# Altium PCB Item.PcbDoc
Units mm, origin at the board's own origin, x right, y up, seen from the top; angles counter-clockwise.
Board outline 41 x 41 mm, 2 copper layers (Top Layer, Bottom Layer); 32 components, 42 nets, 161 pads, 99 vias.
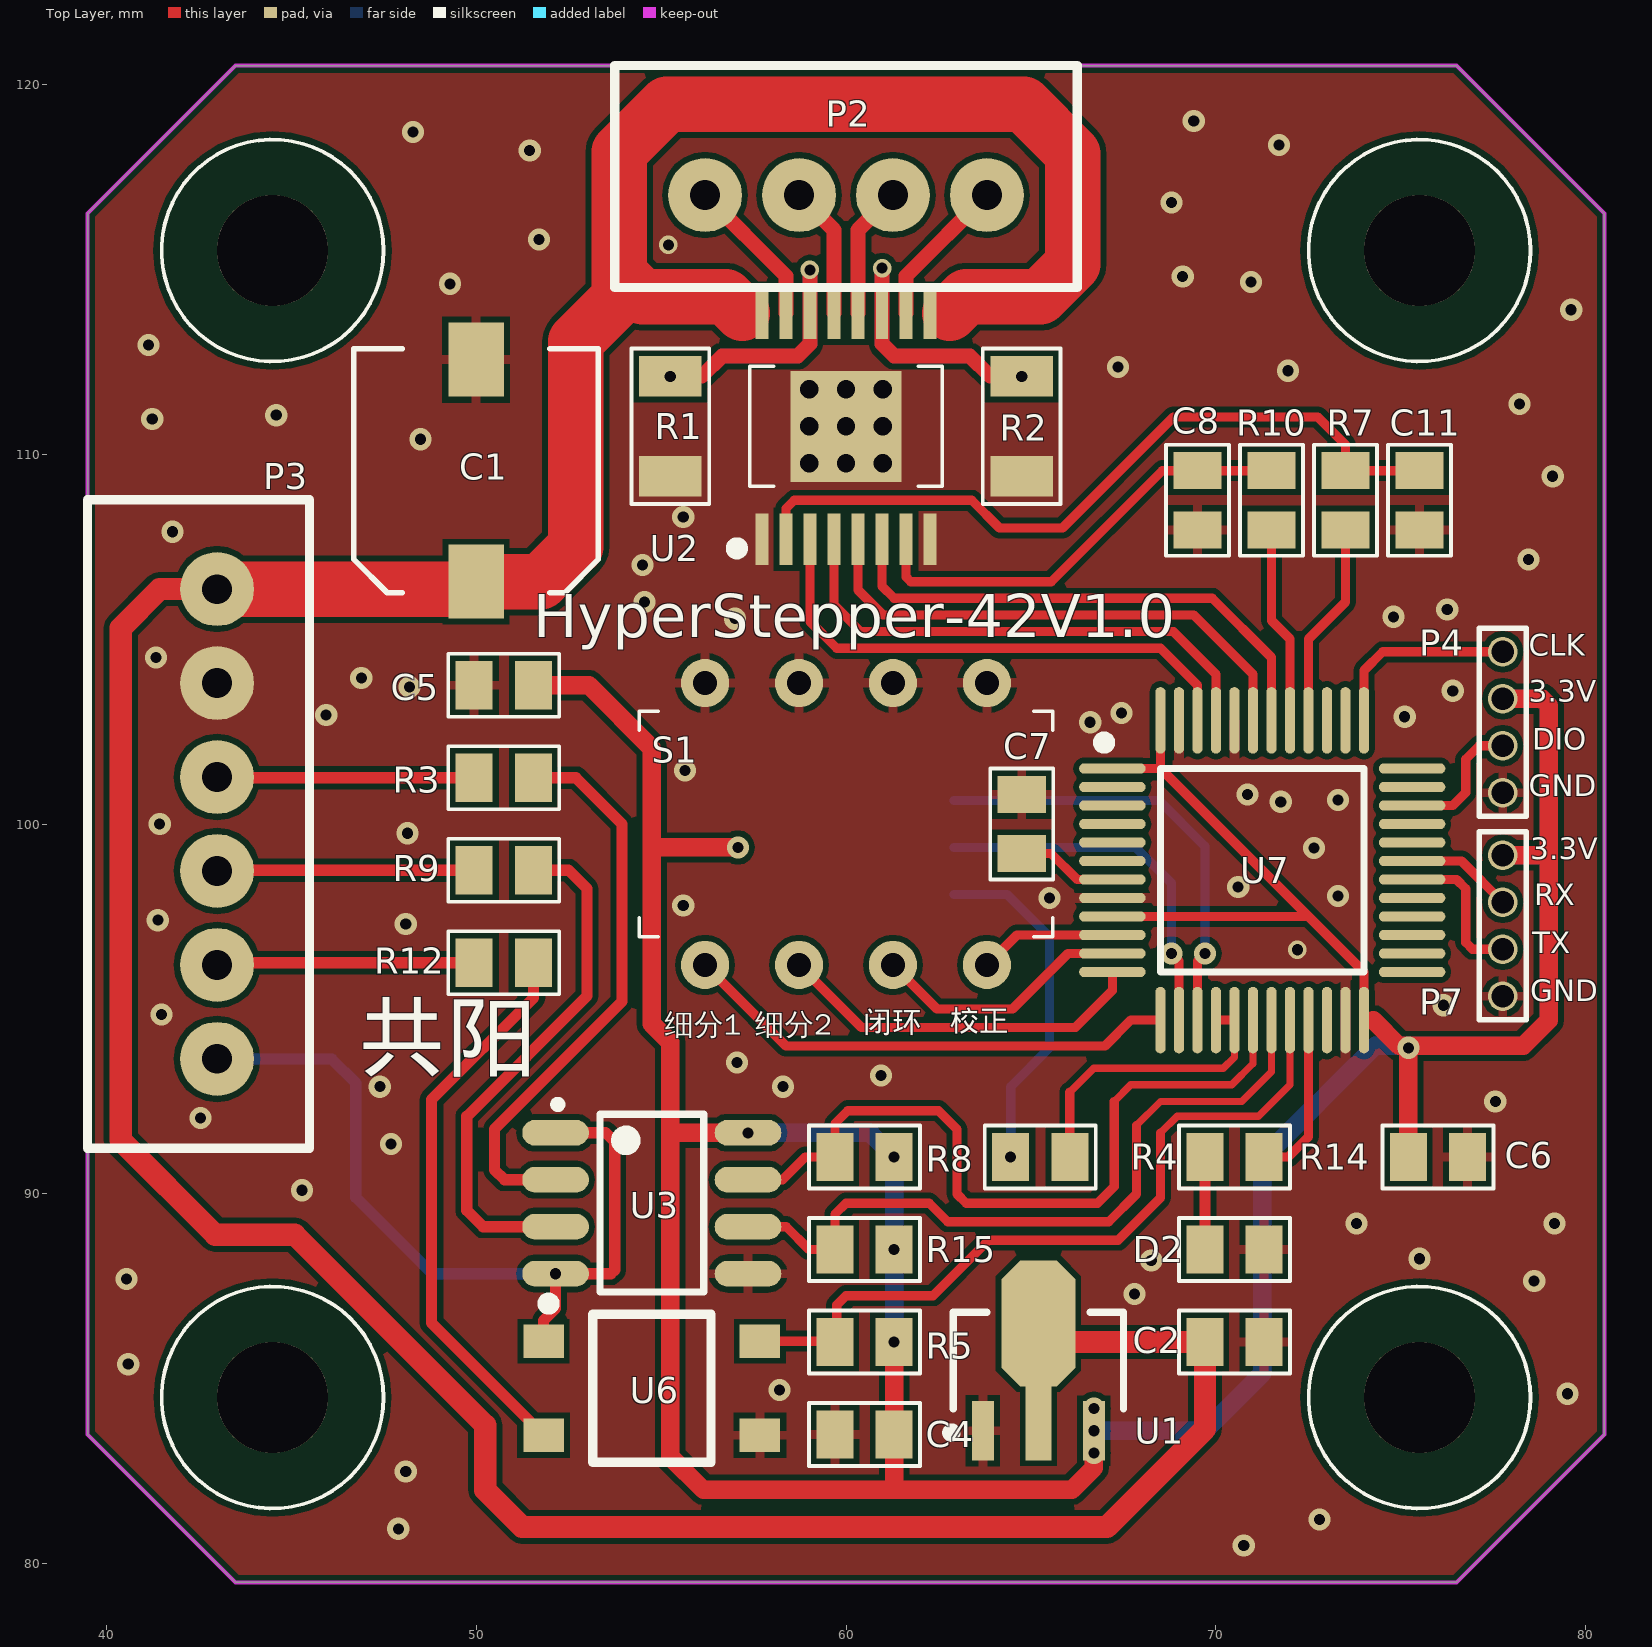
[diagram p0: Top Layer view]
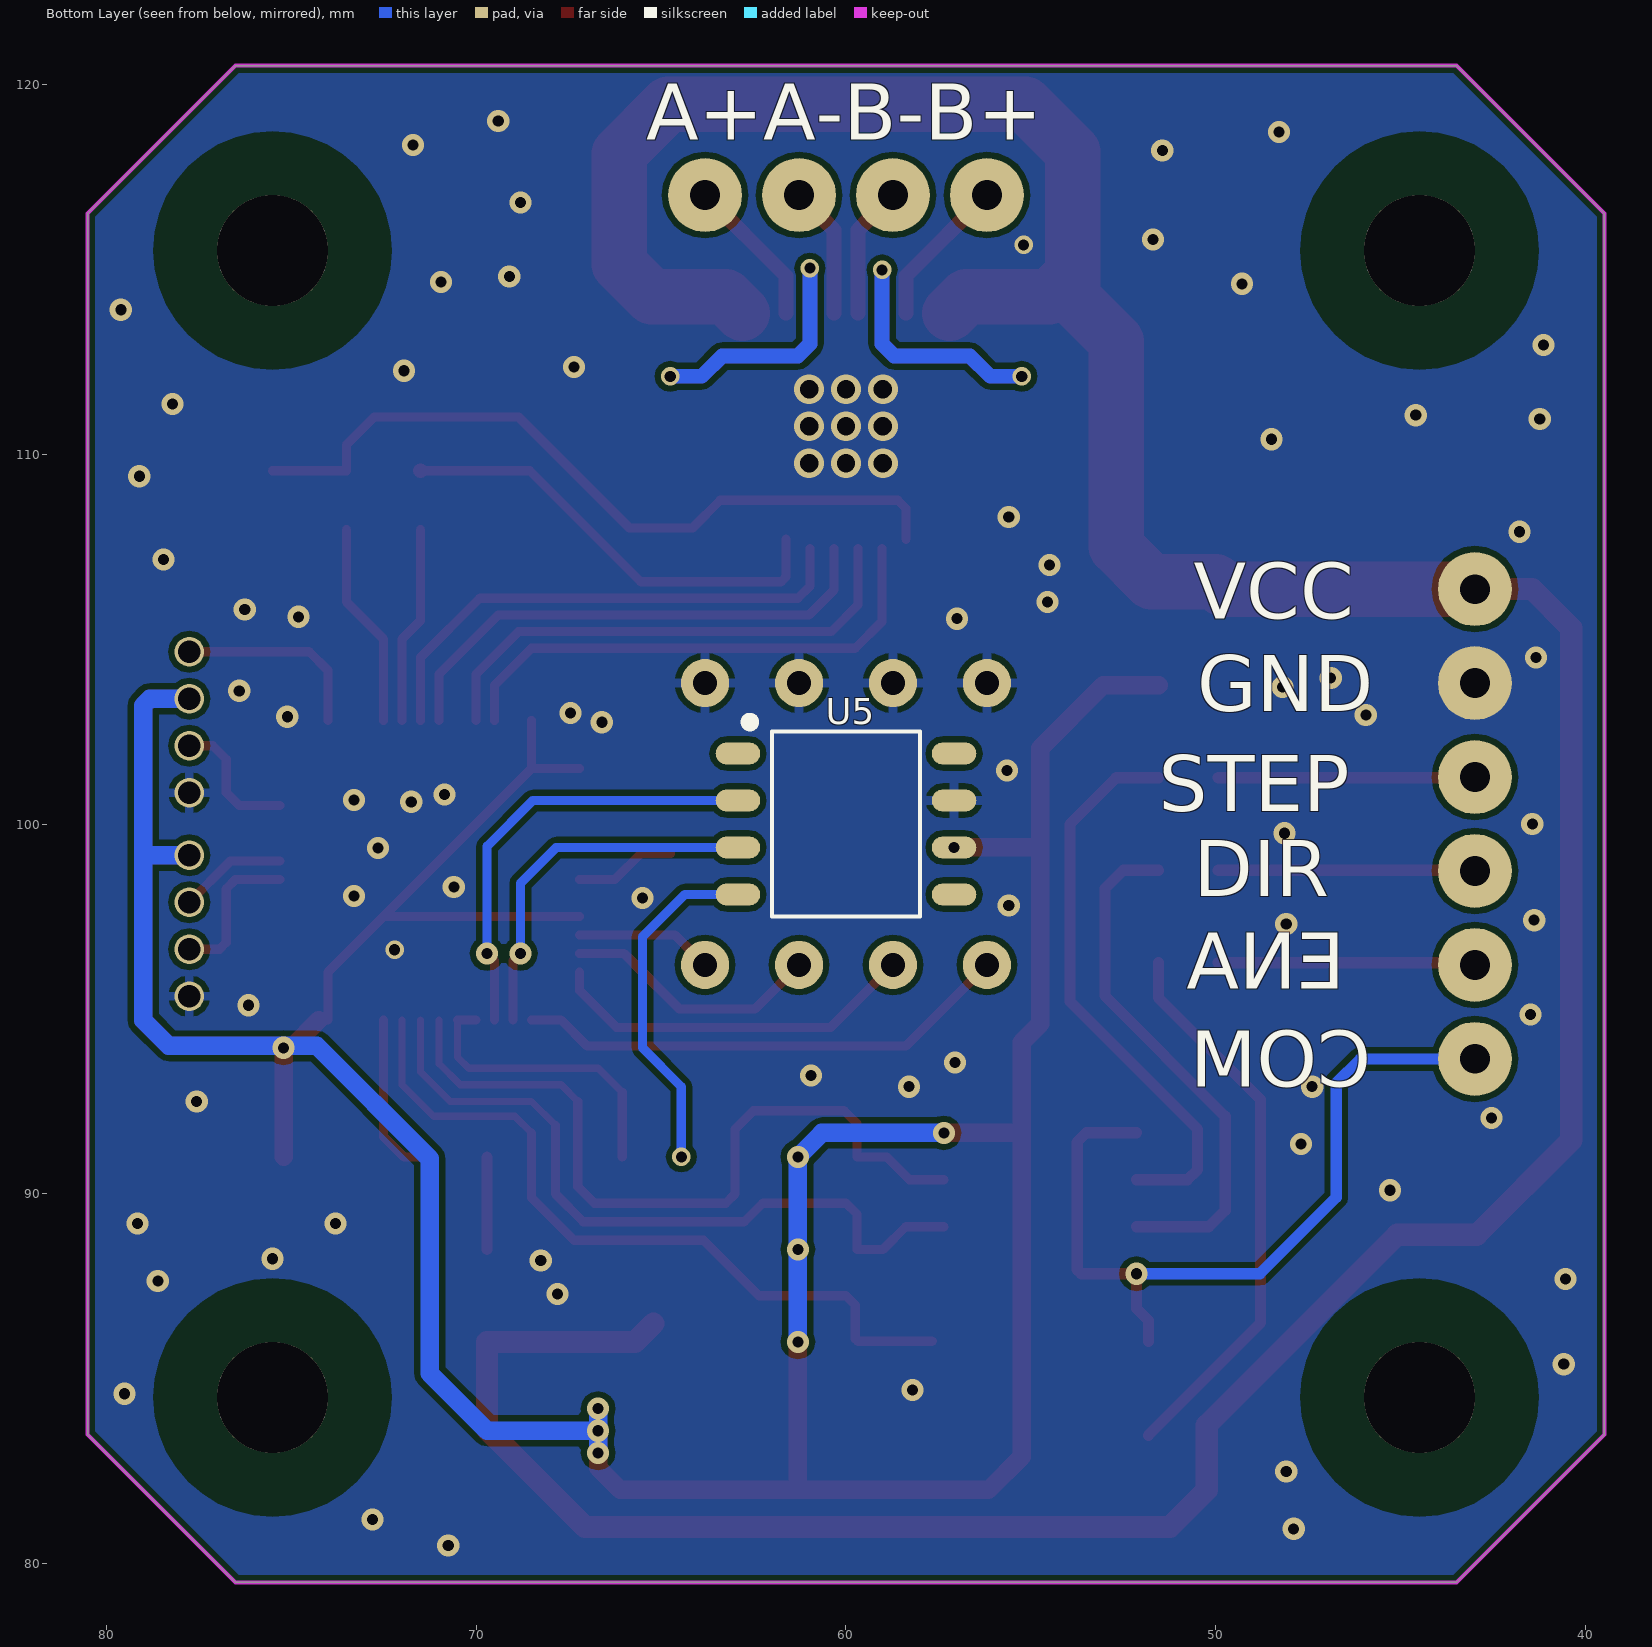
[diagram p1: Bottom Layer view, seen from below]

## Layer stack, top to bottom
Top Layer: signal copper 0.0356
Dielectric: dielectric 0.32, FR-4, Dk 4.8
Bottom Layer: signal copper 0.0356

## Board outline
39.5,116.5 43.5,120.5 76.5,120.5 80.5,116.5 80.5,83.5 76.5,79.5 43.5,79.5 39.5,83.5

## Design rules (kind name [scope] priority, off if disabled: settings)
Clearance [All] p1: gap=0.16
ComponentClearance [All] p1: gap=0 collisioncheckmode=3 verticalgap=0 showdistances=FALSE
HoleSize [All] p1: absolutevalues=TRUE maxlimit=5 minlimit=0.3 maxpercent=80.000 minpercent=20.000
HoleToHoleClearance [All] p1: gap=0.16 allowstackedmicrovias=TRUE
MinimumSolderMaskSliver [All] p1: minsoldermaskwidth=0
PolygonConnect PolygonConnect_2 [(InComponent('U2') OR InComponent('R1') OR InComponent('R2') OR InComponent('P3'))] p1: connectstyle=Direct reliefconductorwidth=0.254 reliefentries=4 polygonreliefangle="90 Angle"
PolygonConnect PolygonConnect_1 [isvia] p2: connectstyle=Direct reliefconductorwidth=0.254 reliefentries=4 polygonreliefangle="90 Angle"
PolygonConnect [All] p3: connectstyle=Relief reliefconductorwidth=0.254 reliefentries=4 polygonreliefangle="90 Angle"
RoutingVias [All] p1: holewidth=0.3 width=0.6 viastyle="Through Hole" minholewidth=0.3 minwidth=0.5 maxholewidth=0.711 maxwidth=1.27
SilkToSilkClearance [All] p1: silktosilkclearance=0
SilkscreenOverComponentPads [All] p1: minsilkscreentomaskgap=0.1
SolderMaskExpansion [All] p1: expansion=0.102
Width [All] p1: maxlimit=5 minlimit=0.16 preferedwidth=0.25
22 further rules are at their usual default settings.

## Components (designator, comment, footprint, x,y, rotation, side; value= is the part's Value field where it differs from the comment)
C1 "CAP POL" CAP6377 50,109.55 r180 top
C2 "CAP" 0805 70.5,86 r0 top
C4 "CAP" 0805 60.5,83.5 r180 top
C5 "CAP" 0805 50.75,103.75 r180 top
C6 "CAP" 0805 76,91 r0 top
C7 "CAP" 0805 64.75,100 r270 top
C8 "CAP" 0805 69.5,108.75 r270 top
C11 "CAP" 0805 75.5,108.75 r270 top
D2 "LED" 0805 70.5,88.5 r0 top
P2 "HEADER4" XH-4 60,117 r180 top
P3 "HEADER6" XH-6 43,100 r270 top
P4 "HEADER4" 4P-1.27MM 77.75,102.75 r270 top
P7 "HEADER4" 4P-1.27MM 77.75,97.25 r270 top
R1 "RES" 1206 55.25,110.75 r90 top
R2 "RES" 1206 64.75,110.75 r90 top
R3 "RES" 0805 50.75,101.25 r0 top
R4 "RES" 0805 65.25,91 r0 top
R5 "RES" 0805 60.5,86 r0 top
R7 "RES" 0805 73.5,108.75 r270 top
R8 "RES" 0805 60.5,91 r0 top
R9 "RES" 0805 50.75,98.75 r0 top
R10 "RES" 0805 71.5,108.75 r90 top
R12 "RES" 0805 50.75,96.25 r0 top
R14 "RES" 0805 70.5,91 r180 top
R15 "RES" 0805 60.5,88.5 r180 top
S1 "SWDIP-4" SWDIP-4 60,100 r90 top
U1 "HT7333" SOT89 65.2,85.5 r0 top
U2 "A4954" TSSOP16-A4954 60,110.75 r0 top
U3 "TLP2168" SO-8_3.9MM 54.75,89.75 r270 top
U5 "TLE5012B" PG-DSO-8F 60,100 r180 bottom
U6 "EL817" SOP-4_P2.54 54.75,84.75 r0 top
U7 "STM32F030C8" LQFP-48_7x7x05P 71.25,98.75 r270 top

## Footprints (in the part's own frame and the unit in brackets; to place one, negate y for a bottom-side part, rotate by r counter-clockwise, add the part's x,y. Pads: shape width x height; smd on the part's side, far side on the other; paste and mask are expansions set on the pad)
4P-1.27MM [mm]
  round 0.8 hole 0.6: 1(-1.905,0) 2(-0.635,0) 3(0.635,0) 4(1.905,0)
  silkscreen extent -2.54,-0.64 2.54,0.64
0805 [mm] "Chip Resistor, Body 2.0x1.2mm, IPC High Density"
  rect 1x1.3 smd: 1(-0.8,0) 2(0.8,0)
  silkscreen extent -1.5,-0.85 1.5,0.85
1206 [mm] "Chip Capacitor, Body 3.2x1.6mm, IPC High Density"
  rect 1.1x1.7 smd: 1(-1.35,0) 2(1.35,0)
  silkscreen extent -2.1,-1.05 2.1,1.05
CAP6377 [mm]
  rect 1.5x2 smd: 1(0,3) 2(0,-3)
  silkscreen extent -3.3,-3.3 3.3,3.3
LQFP-48_7x7x05P [mm]
  oval 0.28x1.8 smd mask+0.051: 1(-2.75,-4.05) 2(-2.25,-4.05) 3(-1.75,-4.05) 4(-1.25,-4.05) 5(-0.75,-4.05) 6(-0.25,-4.05) 7(0.25,-4.05) 8(0.75,-4.05) 9(1.25,-4.05) 10(1.75,-4.05) 11(2.25,-4.05) 12(2.75,-4.05) 25(2.75,4.05) 26(2.25,4.05) 27(1.75,4.05) 28(1.25,4.05) 29(0.75,4.05) 30(0.25,4.05) 31(-0.25,4.05) 32(-0.75,4.05) 33(-1.25,4.05) 34(-1.75,4.05) 35(-2.25,4.05) 36(-2.75,4.05)
  oval 1.8x0.28 smd mask+0.051: 13(4.05,-2.75) 14(4.05,-2.25) 15(4.05,-1.75) 16(4.05,-1.25) 17(4.05,-0.75) 18(4.05,-0.25) 19(4.05,0.25) 20(4.05,0.75) 21(4.05,1.25) 22(4.05,1.75) 23(4.05,2.25) 24(4.05,2.75) 37(-4.05,2.75) 38(-4.05,2.25) 39(-4.05,1.75) 40(-4.05,1.25) 41(-4.05,0.75) 42(-4.05,0.25) 43(-4.05,-0.25) 44(-4.05,-0.75) 45(-4.05,-1.25) 46(-4.05,-1.75) 47(-4.05,-2.25) 48(-4.05,-2.75)
  silkscreen extent -3.6,-4.42 2.75,2.75
PG-DSO-8F [mm] "SOP, 8-Leads, Body 4.9x3.9mm, Pitch 1.27mm, IPC Medium Density"
  oval 1.2x0.6 smd: 1(-2.921,1.905) 2(-2.921,0.635) 3(-2.921,-0.635) 4(-2.921,-1.905) 5(2.921,-1.905) 6(2.921,-0.635) 7(2.921,0.635) 8(2.921,1.905)
  silkscreen extent -2.73,-2.5 2,2.88
SO-8_3.9MM [mm]
  oval 0.7x1.8 smd: 1(-1.905,-2.6) 2(-0.635,-2.6) 3(0.635,-2.6) 4(1.905,-2.6) 5(1.905,2.6) 6(0.635,2.6) 7(-0.635,2.6) 8(-1.905,2.6)
  silkscreen extent -2.75,-2.62 2.4,1.4
SOP-4_P2.54 [mm]
  rect 1.1x0.9 smd: 1(-2.921,1.27) 2(-2.921,-1.27) 3(2.921,-1.27) 4(2.921,1.27)
  silkscreen extent -2.94,-2 1.6,2.44
SOT89 [mm] "SOT89, 3-Leads, Body 4.5x2.4 mm, Pitch 1.5mm, Lead Span 4.1mm, IPC Low Density"
  rect 0.6x1.6 smd: 1(-1.5,-1.9) 3(1.5,-1.9)
  rect 0.7x2 smd: 2(0,-1.7)
  oct 2x3.4 smd: 2(0,1)
  silkscreen extent -2.47,-2.07 2.3,1.3
SWDIP-4 [mm]
  round 1.3 hole 0.65: 1(-3.81,3.81) 2(3.81,3.81) 3(-3.81,1.27) 4(3.81,1.27) 5(-3.81,-1.27) 6(3.81,-1.27) 7(-3.81,-3.81) 8(3.81,-3.81)
  silkscreen extent -3.05,-5.59 3.05,5.59
TSSOP16-A4954 [mm]
  rect 0.35x1.4 smd: 1(-2.275,-3.055) 2(-1.625,-3.055) 3(-0.975,-3.055) 4(-0.325,-3.055) 5(0.325,-3.055) 6(0.975,-3.055) 7(1.625,-3.055) 8(2.275,-3.055) 9(2.275,3.055) 10(1.625,3.055) 12(0.325,3.055) 13(-0.325,3.055) 14(-0.975,3.055) 15(-1.625,3.055) 16(-2.275,3.055)
  rect 0.32x1.4 smd: 11(0.975,3.055)
  rect 3x3 smd: 17(0,0)
  silkscreen extent -3.1,-3.45 2.6,1.63
XH-4 [mm]
  round 2 hole 0.8: 1(-3.81,0) 2(-1.27,0) 3(1.27,0) 4(3.81,0)
  silkscreen extent -6.25,-3.5 6.25,2.5
XH-6 [mm]
  round 2 hole 0.8: 1(-6.35,0) 2(-3.81,0) 3(-1.27,0) 4(1.27,0) 5(3.81,0) 6(6.35,0)
  silkscreen extent -8.76,-3.5 8.76,2.5

## Part data
C1: "Polarized Capacitor (Axial)"
C2 C4 C5 C6 C7 C8 C11: "Capacitor"
D2: "Typical INFRARED GaAs LED"
P2 P4 P7: "Header, 4-Pin"
P3: "Header, 6-Pin"
R1 R2 R3 R4 R5 R7 R8 R9 R10 R12 R14 R15: "Resistor"
S1: "DIP Switch, 4Position, SPST"
U1: "Positive Voltage Regulator"
U2: "Dual Full-Bridge  DMOS PWM Motor Driver"
U3: "HIGH SPEED 10MBit/s LOGIC GATE  PHOTOCOUPLER"
U5: "GMR-Based Angle Sensor"
U6: "4 PIN PHOTOTRANSISTOR"
U7: "ST Microcontroller"

## Free pads (board coordinates)
  round 3 hole 3: ""(44.5,84.5) ""(44.5,115.5) ""(75.5,84.5) ""(75.5,115.5)

## Via types
v1: diameter 0.6, hole 0.3, Top Layer to Bottom Layer, 83 vias
v2: diameter 0.8, hole 0.5, Top Layer to Bottom Layer, 9 vias
v3: diameter 0.5, hole 0.3, Top Layer to Bottom Layer, 7 vias

## Nets (pads, with @x,y where several pads share a name; then routed paths per layer and width w, separated by ;. In a path a pad name is that pad's centre, name@x,y a point inside that pad or via, vN(x,y) a via of type N, cw(c..) or ccw(c..) an arc to the next point about the centre after c; other vN are vias at no path point)
3.3V: C4.1 C5.1 C6.1 P4.2 P7.1 R5.2 R8.2 R15.1 U1.3 U3.8 U5.6 U7.1 U7.9 U7.24 U7.48 | length 123.2
  Top Layer w0.25: U7.9 72.5,97.5 ; U7.1 68.5,101.5 ; U7.48 68.5,101.5 ; 74.25,94.7 U7.24 74,96 72.5,97.5 ; 68.5,101.5 72.5,97.5
  Top Layer w0.5: C5.1 53.05,103.75 54.75,102.05 54.75,99.365 ; 55.25,91.655 U3.8 ; v1(57.079,99.365) 54.75,99.365 ; v1(61.3,86) C4.1 61.3,82 ; v1(66.7,83.6) 66.7,82.6 66.1,82 61.3,82 ; 74.25,94.7 74.95,94 v1@75.25,94 ; C6.1 v1(75.2,93.95) v1@75.25,94 ; P7.1 79,99.155 ; P4.2 78.815,103.385 79,103.2 79,99.155 ; 54.75,99.365 54.75,94.6 55.25,94.1 55.25,82.9 56.15,82 61.3,82 ; v1@75.25,94 78.3,94 79,94.7 79,99.155
  Bottom Layer w0.5: v1(57.355,91.65) 60.65,91.65 v1(61.3,91) v1(61.3,88.5) v1(61.3,86) ; v1(66.7,83) v1(66.7,83.6) ; v1(66.7,84.2) v1(66.7,83.6) ; P7.1 78.995,99.155 79,99.15 ; P4.2 78.815,103.385 79,103.2 79,99.15 ; v1(66.7,83.6) 69.7,83.6 71.25,85.15 71.25,90.95 74.3,94 78.3,94 79,94.7 79,99.15
CAL: S1.7 U7.10 | length 3.7
  Top Layer w0.25: S1.7 64.62,97 U7.10
CLK-: P3.3 R3.1 | length 7
  Top Layer w0.3: P3.3@43,101.25 R3.1
CLKIN: R8.1 U3.7 U7.18 | length 21.1
  Top Layer w0.2: 67.25,92.5 67.7,92.95 70.425,92.95 71,93.525 U7.18
  Top Layer w0.25: U3.7 58.285,90.385 58.9,91 R8.1 59.7,91.9 60.05,92.25 62.5,92.25 63,91.75 63,90 63.25,89.75 66.8,89.75 67.25,90.2 67.25,92.5
COM: P3.6 U3.1 U3.4 U6.1 | length 22.1
  Top Layer w0.3: U6.1 51.829,86.579 52.15,86.9 v1(52.15,87.845) 53.645,87.845 53.75,87.95 53.75,91.4 53.495,91.655 U3.1
  Bottom Layer w0.3: P3.6 46.1,93.65 46.75,93 46.75,89.9 48.805,87.845 v1(52.15,87.845)
CSQ: U5.3 U7.14 | length 10.1
  Top Layer w0.25: v1(68.8,96.5) 69,96.3 U7.14
  Bottom Layer w0.25: U5.3 67.835,99.365 68.8,98.4 v1(68.8,96.5)
DATA: R4.1 U5.4 | length 9.4
  Bottom Layer w0.25: U5.4 64.355,98.095 65.5,96.95 65.5,93.95 64.45,92.9 v3(64.45,91)
DIR-: P3.4 R9.1 | length 7
  Top Layer w0.3: P3.4@43,98.75 R9.1
DIRIN: R15.2 U3.6 U7.19 | length 19.8
  Top Layer w0.2: 67.85,91.85 68.5,92.5 70.7,92.5 71.5,93.3 U7.19
  Top Layer w0.25: U3.6 58.385,89.115 59,88.5 R15.2 59.7,89.45 60,89.75 62.25,89.75 62.75,89.25 67.1,89.25 67.85,90 67.85,91.85
EN-: P3.5 R12.1 | length 7
  Top Layer w0.3: P3.5@43,96.25 R12.1
ENIN: R5.1 U6.4 U7.20 | length 20.5
  Top Layer w0.2: 68.5,91.65 68.95,92.1 71.15,92.1 72,92.95 U7.20
  Top Layer w0.25: U6.4 59.68,86.02 59.75,86.09 59.75,87 60,87.25 62.35,87.25 63.85,88.75 67.35,88.75 68.5,89.9 68.5,91.65
GND: C1.2 C2.2 C4.2 C5.2 C6.2 C7.1 C8.2 C11.2 D2.2 P3.2 P4.4 P7.4 R1.1 R2.1 S1.2 S1.4 S1.6 S1.8 U1.1 U2.1 U2.8 U2.17 U3.5 U5.7 U6.3 U7.8 U7.23 U7.44 U7.47
  other v1: 70.75,80.5 47.9,80.95 72.8,81.2 48.1,82.5 79.5,84.6 58.2,84.7 40.6,85.4 67.8,87.3 78.6,87.65 40.55,87.7 68.25,88.2 75.5,88.25 73.8,89.2 79.15,89.2 45.3,90.1 47.7,91.35 42.55,92.05 77.55,92.5 47.4,92.9 58.3,92.9 60.95,93.2 57.05,93.55 41.5,94.85 76.15,95.1 48.1,97.3 41.4,97.4 55.6,97.8 65.5,98 73.3,98.05 70.6,98.3 72.65,99.35 48.15,99.75 41.45,100 71.75,100.6 73.3,100.65 70.85,100.8 55.65,101.45 66.6,102.75 75.1,102.9 45.95,102.95 67.45,103 76.4,103.6 48.2,103.7 46.9,103.95 41.35,104.5 57,105.55 74.8,105.6 76.25,105.8 54.55,106 54.5,107 78.45,107.15 41.8,107.9 55.6,108.3 79.1,109.4 48.5,110.4 41.25,110.95 44.6,111.05 78.2,111.35 71.95,112.25 67.35,112.35 41.15,112.95 79.6,113.9 49.3,114.6 70.95,114.65 69.1,114.8 51.7,115.8 68.8,116.8 51.45,118.2 71.7,118.35 48.3,118.7 69.4,119
  other v2: 59,109.75 60,109.75 61,109.75 59,110.75 60,110.75 61,110.75 59,111.75 60,111.75 61,111.75
  other v3: 72.2,96.6 55.2,115.65
IN1: U2.6 U7.42 | length 14
  Top Layer w0.25: U2.6@60.975,107.445 60.975,106.425 61.3,106.1 69.9,106.1 71.5,104.5 U7.42
IN2: U2.5 U7.43 | length 14
  Top Layer w0.25: U2.5@60.325,107.445 60.325,106.325 61,105.65 69.4,105.65 71,104.05 U7.43
IN3: U2.3 U7.46 | length 14.1
  Top Layer w0.25: U2.3@59.025,107.445 59.025,105.475 59.75,104.75 68.5,104.75 69.5,103.75 U7.46
IN4: U2.4 U7.45 | length 13.9
  Top Layer w0.25: U2.4@59.675,107.445 59.675,105.925 60.4,105.2 68.85,105.2 70,104.05 U7.45
NetC7_2: C7.2 U7.7 | length 2.7
  Top Layer w0.25: C7.2 65.55,99.2 66.25,98.5 U7.7
NetD2_1: D2.1 R14.2 | length 2.5
  Top Layer w0.3: D2.1 R14.2
NetR1_2: R1.2 U2.14 | length 12.3
  Top Layer w0.4: v3(55.25,112.1) 56.1,112.1 56.65,112.65 58.7,112.65 59.025,112.975 U2.14 v3(59.025,114.975)
  Bottom Layer w0.4: v3(55.25,112.1) 56.1,112.1 56.65,112.65 58.7,112.65 59.025,112.975 v3(59.025,114.975)
NetR2_2: R2.2 U2.11 | length 12.4
  Top Layer w0.4: v3(60.975,115.025) U2.11 60.975,112.975 61.3,112.65 63.35,112.65 63.9,112.1 v3(64.75,112.1)
  Bottom Layer w0.4: v3(60.975,115.025) 60.975,112.975 61.3,112.65 63.35,112.65 63.9,112.1 v3(64.75,112.1)
NetR3_2: R3.2 U3.2 | length 15.5
  Top Layer w0.3: R3.2 52.7,101.25 53.95,100 53.95,95.2 50.5,91.75 50.5,90.65 50.765,90.385 U3.2
NetR4_2: R4.2 U7.16 U7.17 | length 8.1
  Top Layer w0.2: 66.05,92.75 66.7,93.4 70.2,93.4 70.5,93.7 U7.17
  Top Layer w0.25: R4.2 66.05,92.75 ; U7.16 U7.17
NetR9_2: R9.2 U3.3 | length 14.3
  Top Layer w0.3: R9.2 52.5,98.75 53,98.25 53,95.35 49.75,92.1 49.75,89.55 50.185,89.115 U3.3
NetR12_2: R12.2 U6.2 | length 15.2
  Top Layer w0.3: R12.2 51.55,95.3 48.8,92.55 48.8,86.509 U6.2
NetR14_1: R14.1 U7.21 | length 4.6
  Top Layer w0.25: R14.1 71.95,91 72.5,91.55 U7.21
OPCL: S1.5 U7.11 | length 7
  Top Layer w0.25: S1.5 62.46,95 64.5,95 66,96.5 U7.11
OUT1: P2.1 U2.10 | length 4.1
  Top Layer w0.4: U2.10 61.625,114.815 P2.1
OUT2: P2.2 U2.12 | length 3.6
  Top Layer w0.4: U2.12 60.325,116.055 P2.2
OUT3: P2.3 U2.13 | length 3.6
  Top Layer w0.4: P2.3 59.675,116.055 U2.13
OUT4: P2.4 U2.15 | length 4.1
  Top Layer w0.4: P2.4 58.375,114.815 U2.15
PWM1: R7.2 U7.40 | length 5.6
  Top Layer w0.25: U7.40 72.5,105 73.5,106 R7.2
PWM2: R10.1 U7.41 | length 5.4
  Top Layer w0.25: R10.1 71.5,105.5 72,105 U7.41
RX: P7.2 U7.31 | length 2.9
  Top Layer w0.25: U7.31 76.635,99 P7.2
SCK: U5.2 U7.15 | length 12.1
  Top Layer w0.25: U7.15 69.5,96.3 v1(69.7,96.5)
  Bottom Layer w0.25: U5.2 68.465,100.635 69.7,99.4 v1(69.7,96.5)
SET1: S1.1 U7.13 | length 13.5
  Top Layer w0.25: S1.1 58.38,94 67,94 67.7,94.7 U7.13
SET2: S1.3 U7.12 | length 10.1
  Top Layer w0.25: S1.3 60.42,94.5 66.2,94.5 67.2,95.5 U7.12
SWCLK: P4.1 U7.37 | length 5.3
  Top Layer w0.25: U7.37 74,104.15 74.505,104.655 P4.1
SWDIO: P4.3 U7.34 | length 3.6
  Top Layer w0.25: U7.34 76.4,100.5 76.75,100.85 76.75,101.75 77.115,102.115 P4.3
TX: P7.3 U7.30 | length 4.1
  Top Layer w0.25: U7.30 76.5,98.5 76.75,98.25 76.75,96.8 76.935,96.615 P7.3
VIN: C1.1 C2.1 P3.1 U1.2 U2.9 U2.16 | length 105
  Top Layer w0.6: P3.1 41.45,106.35 40.4,105.3 40.4,91.45 42.95,88.9 45.1,88.9 50.25,83.75 50.25,82 51.25,81 67.05,81 69.7,83.65 C2.1 65.7,86 U1.2@65.2,86.5
  Top Layer w1.5: P3.1 49.8,106.35 C1.1 51.75,106.55 52.7,107.5 52.7,113.05 53.871,114.221 53.871,118.171 55.15,119.45 64.8,119.45 66.129,118.121 66.129,115.129 65.25,114.25 63.25,114.25 62.8,113.8 ; 53.871,114.879 54.5,114.25 56.75,114.25 57.2,113.8
VR12: C8.1 R10.2 U2.7 | length 12.2
  Top Layer w0.25: U2.7 61.625,106.675 61.75,106.55 65.55,106.55 68.55,109.55 C8.1 R10.2
VR34: C11.1 R7.1 U2.2 | length 20.6
  Top Layer w0.25: U2.2 58.375,108.525 58.6,108.75 63.4,108.75 64.15,108 65.85,108 68.85,111 72.75,111 73.5,110.25 R7.1 C11.1
pads on no net: U5.1 U5.5 U5.8 U7.2 U7.3 U7.4 U7.5 U7.6 U7.22 U7.25 U7.26 U7.27 U7.28 U7.29 U7.32 U7.33 U7.35 U7.36 U7.38 U7.39

## Polygon pours and split planes (outlines as drawn)
GND on Bottom Layer "Top Layer-No Net" (solid, remove dead copper, pour order 4): 39.5,116.5 39.5,83.5 43.5,79.5 76.5,79.5 80.5,83.5 80.5,116.5 76.5,120.5 43.5,120.5
GND on Top Layer "Top Layer-No Net" (solid, remove dead copper, pour order 6): 39.5,116.5 39.5,83.5 43.5,79.5 76.5,79.5 80.5,83.5 80.5,116.5 76.5,120.5 43.5,120.5

## Keep-outs
Keep-Out Layer:
  lines w0.1: 39.5,83.5 39.5,108.85 39.5,116.5 43.5,120.5 76.5,120.5 80.5,116.5 80.5,83.5 76.5,79.5 43.5,79.5 39.5,83.5

## Silkscreen, mask and mechanical layers (free items; w line width, h text height)
Top Overlay:
  circle w0.1: c44.5,115.5 r3
  circle w0.1: c75.5,115.5 r3
  circle w0.1: c75.5,84.5 r3
  circle w0.1: c44.5,84.5 r3
  text "HyperStepper-42V1.0" at 51.55,104.65 h2
  text "CLK" at 78.45,104.35 h1
  text "3.3V" at 78.45,103.1 h1
  text "DIO" at 78.55,101.8 h1
  text "GND" at 78.45,100.55 h1
  text "3.3V" at 78.5,98.85 h1
  text "RX" at 78.6,97.6 h1
  text "TX" at 78.55,96.3 h1
  text "GND" at 78.5,95 h1
  text "校正" at 62.8,94.2 h1
  text "闭环" at 60.45,94.15 h1
  text "细分1" at 55.1,94.1 h1
  text "细分2" at 57.55,94.1 h1
  text "共阳" at 46.8,92.8 h3
Bottom Overlay:
  text "A+A-B-B+" at 65.4,118.5 h1.52
  text "VCC" at 50.6,105.55 h1.52
  text "GND" at 50.5,103.05 h1.52
  text "STEP" at 51.55,100.35 h1.52
  text "DIR" at 50.6,98.05 h1.52
  text "ENA" at 46.5,95.55 h1.52
  text "COM" at 45.8,92.9 h1.52
Top Solder:
  lines w0.4: 56.195,117.005 58.375,114.825 58.375,113.625 ; 58.73,117 59.675,116.055 59.675,113.5 ; 59,116.5 59.3,116.5 ; 60.325,113.625 60.325,116.05 60.35,116.075 61.27,116.995 61.27,117 ; 61.625,113.625 61.625,114.825 63.8,117 63.81,117
Bottom Solder:
  rectangle: 58.5,109.2 61.5,112.3
  lines w0.3: 55.955,111.955 55.955,111.955